# Altium PCB OGS_Headstage.PcbDoc
Units mil, origin at the board's own origin, x right, y up, seen from the top; angles counter-clockwise.
Board outline 6000 x 4000 mil, 2 copper layers (Top Layer, Bottom Layer); 33 components, 31 nets, 128 pads, 14 vias.
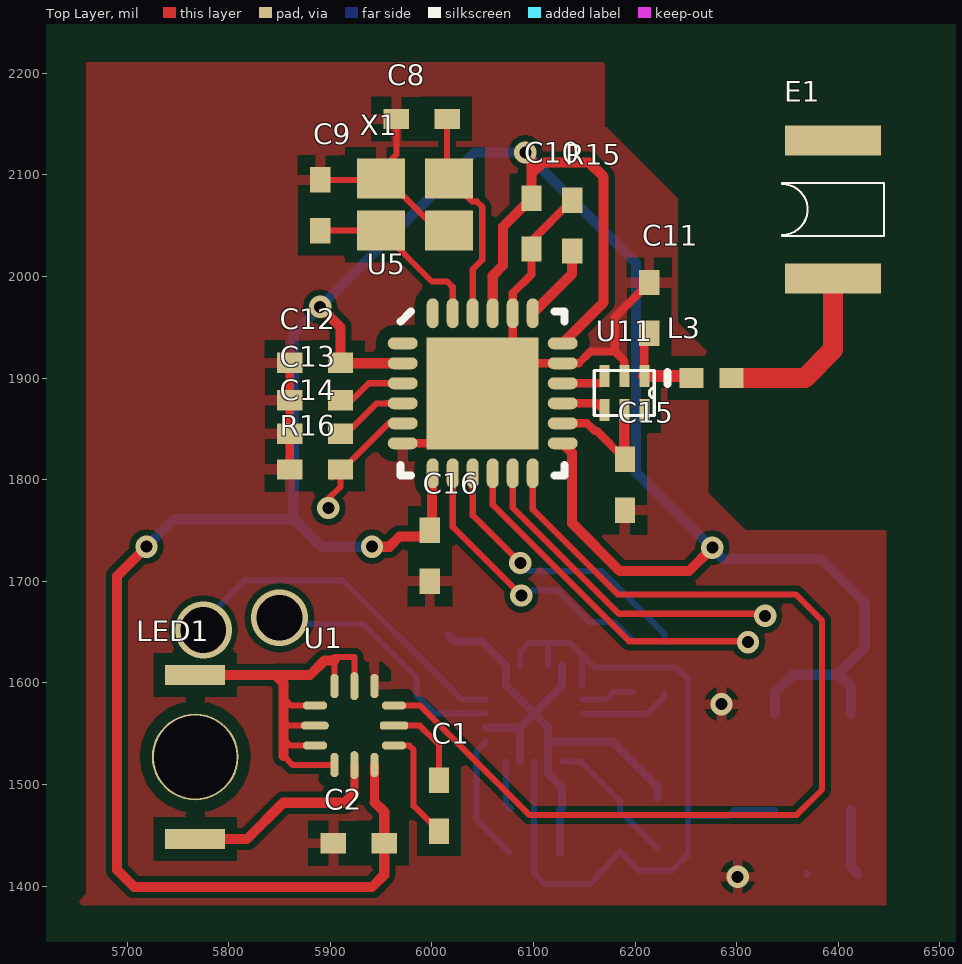
[diagram p0: Top Layer view]
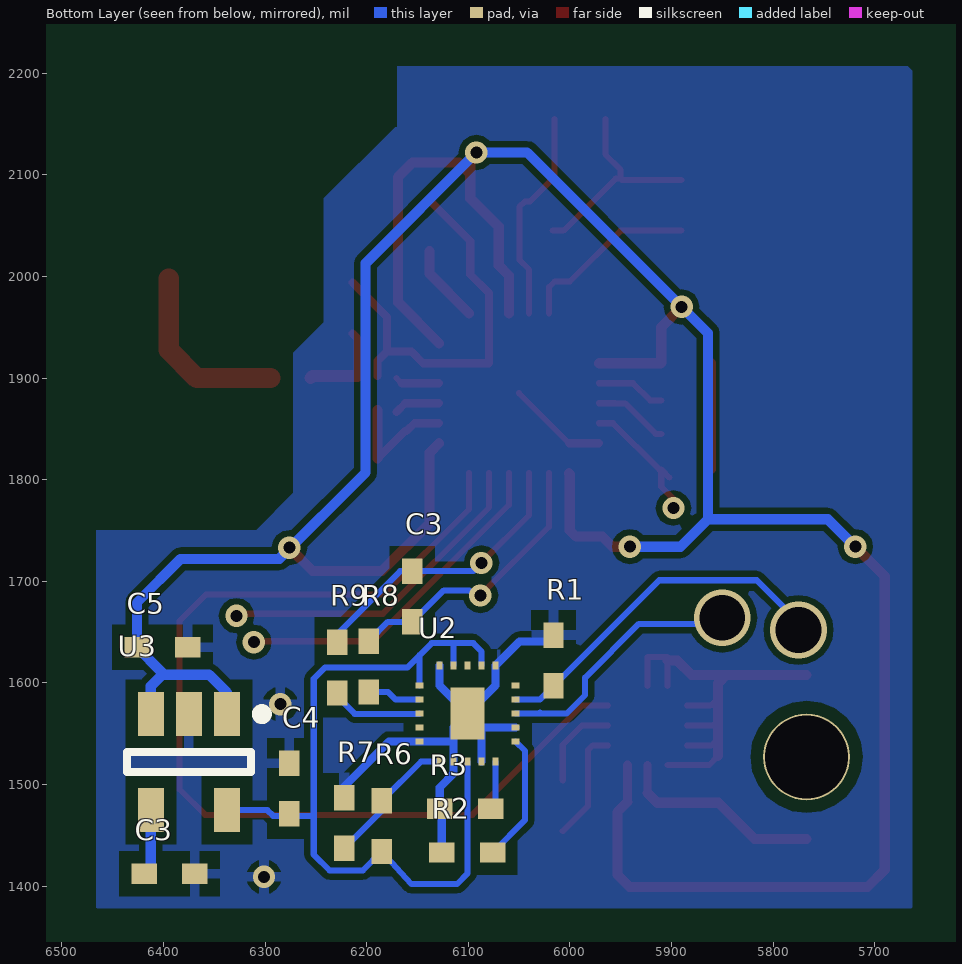
[diagram p1: Bottom Layer view, seen from below]

## Layer stack, top to bottom
Top Layer: signal copper 1.4
Dielectric: dielectric 12.6, FR-4, Dk 4.8
Bottom Layer: signal copper 1.4

## Board outline
1000,1000 7000,1000 7000,5000 1000,5000

## Design rules (kind name [scope] priority, off if disabled: settings)
Clearance Plane_pad_clear [IsPad vs InPolygon] p1: gap=12
Clearance "plane clear" [InPolygon vs InNetClass('All Nets')] p2: gap=6
Clearance clearance1 [All] p3: gap=6
ComponentClearance [All] p1: gap=6 collisioncheckmode=3 verticalgap=0 showdistances=TRUE
Height [All] p1 off: minheight=0 maxheight=1000 prefheight=500
HoleSize [All] p1: absolutevalues=TRUE maxlimit=100 minlimit=10 maxpercent=80.000 minpercent=20.000
HoleToHoleClearance [All] p1: gap=6 allowstackedmicrovias=TRUE
MinimumSolderMaskSliver [All] p1: minsoldermaskwidth=6
PlaneClearance [All] p1: clearance=15
PolygonConnect [All] p1: connectstyle=Relief reliefconductorwidth=10 reliefentries=4 polygonreliefangle="90 Angle"
RoomDefinition SingleASIC [InComponentClass('SingleASIC')] p1 off: confinementstyle=ConfineIn formatcopy=TRUE lockcomponents=FALSE outline 7045,1245 8520,1245 8520,1460 7045,1460
RoomDefinition Main_4x4 [InComponentClass('Main_4x4')] p2 off: confinementstyle=ConfineIn formatcopy=TRUE lockcomponents=FALSE outline 0,0 2000,0 2000,1000 0,1000
RoomDefinition LED_SOP [InComponentClass('LED_SOP')] p3 off: confinementstyle=ConfineIn formatcopy=TRUE lockcomponents=FALSE outline 7045,1060 7330,1060 7330,1195 7045,1195
RoutingCorners [All] p1: cornerstyle=45-Degree minsetback=20 maxsetback=20
RoutingVias [All] p1: holewidth=12 width=22 viastyle="Through Hole" minholewidth=12 minwidth=22 maxholewidth=30 maxwidth=50
SilkscreenOverComponentPads [OnLayer('Mechanical 13') vs OnLayer('Mechanical 15')] p1: minsilkscreentomaskgap=10
SolderMaskExpansion [All] p1: expansion=0
Width Width_v3p0 [InNet('V3P0')] p1: maxlimit=50 minlimit=6 preferedwidth=10
Width [All] p2: maxlimit=30 minlimit=6 preferedwidth=6
20 further rules are at their usual default settings.

## Classes and differential pairs
component class SingleASIC: C3 C4 C5 R1 R2 R3 R6 R7 R8 R9 U2 U3
component class Main_4x4: C8 C9 C10 C11 C12 C13 C14 C15 C16 E1 L3 R15 R16 U5 U11 X1
component class LED_SOP: C1 C2 LED1 U1

## Components (designator, comment, footprint, x,y, rotation, side; value= is the part's Value field where it differs from the comment)
C1 "NP0 50V" 0402S 6007,1479 r90 top
C2 "NP0 50V" 0402S 5928,1442 r0 top
C3 "NP0 50V" 0402s 6394,1412 r0 bottom
C3 "NP0 50V" 0402S 6155,1685 r90 bottom
C4 "NP0 50V" 0402s 6276,1496 r90 bottom
C5 "NP0 50V" 0402s 6401,1635 r0 bottom
C8 "NP0 50V" 0402S 5990,2155 r0 top
C9 "NP0 50V" 0402S 5890,2070 r90 top
C10 "NP0 50V" 0402S 6098,2052 r270 top
C11 "NP0 50V" 0402S 6214,1969 r270 top
C12 "NP0 50V" 0402S 5885,1915 r180 top
C13 "NP0 50V" 0402S 5885,1878 r0 top
C14 "NP0 50V" 0402S 5885,1845 r180 top
C15 "NP0 50V" 0402S 6190,1795 r270 top
C16 "NP0 50V" 0402S 5998,1725 r90 top
E1 "MicroAntenna" MICROANTENNA 6394.73,1998 r90 top
L3 "Inductor" 0402-A 6275,1900 r0 top
LED1 "osram_hiled" "OSRAM LED" 5767,1527 r270 top
R1 "Res2" 0402S 6016,1622 r270 bottom
R2 "Res2" 0402S 6101,1433 r0 bottom
R3 "Res2" 0402S 6103,1476 r0 bottom
R6 "Res2" 0402S 6185,1459 r270 bottom
R7 "Res2" 0402S 6222,1462 r270 bottom
R8 "Res2" 0402S 6198,1616 r270 bottom
R9 "Res2" 0402S 6229,1615 r270 bottom
R15 "Res2" 0402S 6138,2050 r90 top
R16 "Res2" 0402S 5885,1810 r0 top
U1 "ZLED7022" 12UTQFN 5904,1519 r90 top
U2 "Single_ASIC" Single_ASIC 6073,1617 r270 bottom
U3 "tps79915" SOT23-5AN 6375,1522 r270 bottom
U5 "QFN24 4x4 package" NORDIC_QFN50P400X400X90-25N 6050,1885 r0 top
U11 "balun" BALUN 6209,1902 r270 top
X1 "TSX-3225, 16MHz, Cl=9pF, +/-10ppm" "BT-XTAL 2.5 X 2 MM" 5950,2045 r0 top

## Footprints (in the part's own frame and the unit in brackets; to place one, negate y for a bottom-side part, rotate by r counter-clockwise, add the part's x,y. Pads: shape width x height; smd on the part's side, far side on the other; paste and mask are expansions set on the pad)
12UTQFN [mm]
  oct 0.6x0.2 smd: 1(0,0) 3(0,-1) 7(1.975,-1) 9(1.975,0)
  oval 0.7x0.2 smd: 2(0,-0.5) 8(1.975,-0.5)
  oct 0.2x0.6 smd: 4(0.487,-1.487) 6(1.487,-1.487) 10(1.487,0.487) 12(0.487,0.487)
  rrect50% 0.2x0.7 smd: 5(0.987,-1.487)
  oval 0.2x0.7 smd: 11(0.987,0.487)
0402-A [mm] "Chip Inductor, Body 1.0x0.5mm, IPC High Density"
  rect 0.6x0.5 smd: 1(-0.5,0) 2(0.5,0)
  silkscreen extent -1.1,-0.15 -1.1,0.15, body extent -0.55,-0.3 0.55,0.3, height 0.55
0402S [mil]
  rect 25x20 smd: 1(-25,0) 2(25,0)
0402s [mil]
  rect 25x20 smd: 1(-25,0) 2(25,0)
BALUN [mm]
  rect 0.55x0.25 smd: 1(0,0) 2(0,-0.5) 3(0,-1) 4(0.85,-1) 5(0.85,-0.5) 6(0.85,0)
  silkscreen extent -0.14,-1.25 0.99,0.25
"BT-XTAL 2.5 X 2 MM" [mm] "Mercury X32 series"
  rect 1.2x1 smd: 1(0,0) 2(1.7,0) 3(1.7,1.3) 4(0,1.3)
MICROANTENNA [mm]
  rect 0.75x2.4 smd: 1(0,0) 2(3.45,0)
  silkscreen extent 1.06,-1.27 2.39,1.27
NORDIC_QFN50P400X400X90-25N [mm] "QFN24 4x4x0.85mm, 0.5mm pitch - Medium Density"
  oval 0.75x0.3 smd: 1(-2,1.25) 2(-2,0.75) 3(-2,0.25) 4(-2,-0.25) 5(-2,-0.75) 6(-2,-1.25) 13(2,-1.25) 14(2,-0.75) 15(2,-0.25) 16(2,0.25) 17(2,0.75) 18(2,1.25)
  oval 0.3x0.75 smd: 7(-1.25,-2) 8(-0.75,-2) 9(-0.25,-2) 10(0.25,-2) 11(0.75,-2) 12(1.25,-2) 19(1.25,2) 20(0.75,2) 21(0.25,2) 22(-0.25,2) 23(-0.75,2) 24(-1.25,2)
  rect 2.8x2.8 smd: 25(0,0)
  silkscreen extent -2.05,-2.05 2.05,2.05
"OSRAM LED" [mm]
  round 2.167 hole 2.067: 0(0,0)
  rect 0.5x1.5 smd: 1(-2.05,0) 2(2.05,0)
Single_ASIC [mm]
  rect 0.15x0.2 smd: 1(0.5,0.5) 2(0.85,0.5) 3(1.2,0.5) 4(1.55,0.5) 5(1.9,0.5) 11(1.9,-1.9) 12(1.55,-1.9) 13(1.2,-1.9) 14(0.85,-1.9) 15(0.5,-1.9)
  rect 0.2x0.15 smd: 6(2.4,0) 7(2.4,-0.35) 8(2.4,-0.7) 9(2.4,-1.05) 10(2.4,-1.4) 16(0,-1.4) 17(0,-1.05) 18(0,-0.7) 19(0,-0.35) 20(0,0)
  rect 1.3x0.85 smd: 21(1.2,-0.7)
SOT23-5AN [mm] "SOT23, 5-Leads, Body 2.9x1.6mm, Pitch 0.95mm, Lead Span 2.8mm, IPC Medium Density"
  rect 1.1x0.65 smd: 1(-1.2,0.95) 2(-1.2,0) 3(-1.2,-0.95) 4(1.2,-0.95) 5(1.2,0.95)
  silkscreen extent -1.32,-1.55 0.25,1.95, body extent -0.9,-1.55 0.9,1.55, height 1.45

## Part data
C1 C2 C3 C3 C4 C5 C8 C9 C10 C11 C12 C13 C14 C15 C16: library part Cap, "Capacitor"
R1 R2 R3 R6 R7 R8 R9 R15 R16: "Resistor"
U1: "ZLED 7022"
U5: library part "nRF24LE1 - 4x4", "2.4GHz Tranceiver with embedded MCU and 10 bit ADC"
X1: library part BT-XTAL, "Crystal"

## Via types
v1: diameter 22, hole 11.8, Top Layer to Bottom Layer, 12 vias
v2: diameter 56, hole 45, Top Layer to Bottom Layer, 2 vias

## Nets (pads, with @x,y where several pads share a name; then routed paths per layer and width w, separated by ;. In a path a pad name is that pad's centre, name@x,y a point inside that pad or via, vN(x,y) a via of type N, cw(c..) or ccw(c..) an arc to the next point about the centre after c; other vN are vias at no path point)
ADC+: C3.2@6155,1710 R9.1 U5.9 | length 275.3
  Top Layer w6: U5.9 6040.16,1764.84 v1(6087,1718)
  Bottom Layer w6: 6095,1710 6155,1710 6167,1710 6229,1648 R9.1
ADC-: C3.1@6155,1660 R8.1 U5.8 | length 279.3
  Top Layer w6: U5.8 6020.47,1753.53 v1(6088,1686)
  Bottom Layer w6: v1@6091,1683 6099,1691 6124,1691 6155,1660 6179,1660 R8.1
ELEC: U2.3 | length 262.8
  Bottom Layer w6: v2(5850,1664) 5850,1662 5846,1658 5932,1658 5985,1605 5985,1588 6003.24,1569.76 6030.36,1569.76 ; 6029.46,1570.65 6030.36,1569.76 ; U2.3 6030.36,1569.76
ELEC_REF: R1.2 U2.2 | length 354.8
  Bottom Layer w6: v2(5775,1652) 5773,1652 5773,1658 5816,1701 5912,1701 R1.2 6029.46,1583.54 U2.2
GND: C2.1 C3.1@6369,1412 C4.2 C5.1 C8.1 C9.2 C10.2 C11.1 C12.2 C13.1 C14.2 C15.2 C16.1 R1.1 R2.2 R3.2 R7.1 R15.2 R16.1 U1.7 U2.4 U2.7 U2.9 U2.11 U2.16 U2.20 U2.21 U3.2 U5.6 U5.17 U5.20 U5.25 U11.2 X1.2 X1.4 | length 1376.7
  Top Layer w6: C9.2 5948.82,2095 X1.4 ; C8.1 5965,2120 5950,2105 X1.4 ; U5.25@6000.79,1835.79 U5.25 ; X1.2 6006.03,2045 5954.85,2096.18 X1.4
  Top Layer w8: R16.1 C14.2 C13.1 C12.2 ; U5.6 U5.25@6000.79,1835.79 ; R15.2 6098,2035 C10.2 6098,2002 6079.53,1983.53 U5.20 6079.53,1914.53 U5.17 6144.53,1914.53 6156,1926 6180,1926 ; U11.2 6189.31,1916.68 6180,1926 ; C11.1 6180,1960 6180,1926
  Bottom Layer w8: R1.1 6022.5,1640.5 6049.5,1640.5 U2.20 6073,1597.32 U2.21 ; U2.4 U2.21@6086.78,1555.98 ; U2.7 U2.21@6086.78,1555.98 ; R2.2 6126,1474 R3.2 6128,1497 6114.34,1510.66 U2.9 6114.34,1542.2 ; U2.16 6128.12,1597.32 U2.21 ; R7.1 6222,1498 6177.8,1542.2 U2.11 6114.34,1542.2 ; U2.21@6086.78,1555.98 U2.21 ; U2.21 6114.34,1555.98 6114.34,1542.2
  other v1: 6301,1409 6285,1579
LED_CTRL: U1.6 U5.12 | length 1008.1
  Top Layer w6: U1.6 5988.44,1577.56 6096,1470 6359,1470 6384,1495 6384,1661 6358,1687 6183,1687 6099.21,1770.79 U5.12
NetC1_1: C1.1 U1.4 | length 111.5
  Top Layer w6: U1.4 5977.81,1538.19 5982,1534 5982,1479 C1.1
NetC1_2: C1.2 U1.5 | length 87.3
  Top Layer w6: U1.5 5988.12,1557.88 6007,1539 C1.2
NetC3_2: C3.2@6419,1412 U3.4 | length 65.5
  Bottom Layer w10: U3.4 6412.4,1418.6 C3.2@6419,1412
NetC8_2: C8.2 U5.22 X1.3 | length 212.3
  Top Layer w6: C8.2 6015,2098.11 X1.3 6039.43,2073.68 6044.28,2073.68 6049.55,2068.41 6049.55,2016.32 6040.16,2006.92 U5.22
NetC9_1: C9.1 U5.23 X1.1 | length 179.2
  Top Layer w6: C9.1 X1.1 6000,1995 6015,1995 6020.47,1989.53 U5.23
NetC11_2: C11.2 L3.1 U11.1 | length 91.2
  Top Layer w8: U11.1 6209,1939 C11.2
  Top Layer w12: U11.1 6253.32,1902 L3.1
NetC13_2: C13.2 U5.3 | length 68.2
  Top Layer w6: C13.2 5921,1878 5937.84,1894.84 U5.3
NetC14_1: C14.1 U5.4 | length 73.8
  Top Layer w6: C14.1 5915.5,1845 5945.5,1875 5955,1875 5955.16,1875.16 U5.4
NetC15_1: C15.1 U5.14 U11.5 | length 122.8
  Top Layer w8: U5.14 6152.8,1855.47 6160.57,1847.71 6162.29,1847.71 C15.1@6189.31,1820.68
  Top Layer w10: C15.1@6189.31,1820.68 U11.5
NetE1_1: E1.1 L3.2 | length 181.8
  Top Layer w20: L3.2 6367,1900 6394.73,1927.72 E1.1
NetLED1_1: LED1.1 U1.1 U1.8 U1.9 U1.10 U1.11 U1.12 | length 456.9
  Top Layer w6: 5854,1528 5863,1519 U1.1 ; 5854,1545 5860.81,1538.19 U1.12 ; 5854,1563 5859.12,1557.88 U1.11 ; 5854,1585 5861.44,1577.56 U1.10 ; U1.9 5904,1621.88 5904,1625.32 5923.69,1625.32 U1.8
  Top Layer w10: LED1.1 5845.83,1607.71 ; 5854,1528 5854,1545 5854,1563 5854,1585 5854,1599.54 5845.83,1607.71 ; 5904,1621.88 5894.17,1621.88 5880,1607.71 5845.83,1607.71
NetLED1_2: LED1.2 U1.2 | length 202.8
  Top Layer w8: 5923.69,1491.68 U1.2
  Top Layer w10: LED1.2 5818,1446.29 5853.71,1482 5914,1482 5923.69,1491.68
NetR2_1: R2.1 U2.5 | length 126.3
  Bottom Layer w6: U2.5 6044,1532.88 6044,1465 R2.1
NetR3_1: R3.1 U2.6 | length 48.6
  Bottom Layer w6: U2.6 6073,1481 R3.1
NetR6_1: R6.1 R7.2 U2.10 | length 135.2
  Bottom Layer w6: U2.10 6146.49,1522.51 R6.1 6185,1474 R7.2
NetR8_2: R8.2 U2.14 | length 53.3
  Bottom Layer w6: U2.14 6171.54,1583.54 6179,1591 R8.2
NetR9_2: R9.2 U2.13 | length 91.7
  Bottom Layer w6: U2.13 6148.06,1569.5 6211.73,1569.5 6229,1586.77 R9.2
NetR15_1: R15.1 U5.19 | length 77.3
  Top Layer w10: U5.19 6138,2002.53 R15.1
NetR16_2: R16.2 U5.5 | length 136.9
  Top Layer w6: v1@5892,1772 5898,1778 5898,1781 5910,1793 R16.2 ; R16.2@5902,1802 R16.2 ; U5.5 5957.55,1855.47 5912.08,1810 R16.2
  other v1: 5898,1772
NetU5_15: U5.15 U11.4 | length 45.5
  Top Layer w8: U5.15 6162.01,1875.16 U11.4@6170.63,1866.54
NetU5_16: U5.16 U11.3 | length 44
  Top Layer w6: U11.3@6165.47,1894.84 U11.3@6170.63,1900
  Top Layer w8: U5.16 U11.3@6165.47,1894.84
PROGPIN1: U5.10 | length 338.3
  Top Layer w6: U5.10 6059.84,1775.16 6194.06,1640.94 6288,1640.94 6310.11,1640.94 v1(6311.05,1640)
PROGPIN2: U5.11 | length 325.5
  Top Layer w6: U5.11 6079.53,1772.47 6184,1668 v1@6328,1668
  other v1: 6328,1666
V1P5: C4.1 R6.2 U2.8 U2.15 U2.17 U2.19 U3.5 | length 804.5
  Bottom Layer w6: U2.19 6086.78,1630.78 6095,1639 6115.5,1639 ; U2.8 6100.56,1412.44 6111,1402 6156,1402 R6.2 6203.71,1415.29 6236.29,1415.29 6252,1431 6252,1469 ; U2.17 6114.34,1637.84 6115.5,1639 ; U2.15 6147.8,1627.2 ; U3.5 6297.76,1474.76 6292,1469 6252,1469 ; 6115.5,1639 6136,1639 6147.8,1627.2 ; 6147.8,1627.2 6160,1615 6241,1615 6252,1604 6252,1469
V3P0: C2.2 C5.2 C10.1 C12.1 C16.2 U1.3 U3.1 U3.3 U5.2 U5.7 U5.13 U5.18 U5.21 | length 3236.6
  Top Layer w9: 5943.37,1482.63 U1.3
  Top Layer w10: v1(5719,1734) 5690,1705 5690,1416 5707,1399 5941,1399 5953,1411 C2.2 5953,1473 5943.37,1482.63 ; v1(5890,1970) 5910,1950 C12.1 5910.47,1914.53 U5.2 ; v1(5941,1734) 5958,1734 5968,1744 5994,1744 6000,1750 6000,1805.47 U5.7 ; U5.21 6059.84,2000.7 6070,2010.86 6070,2049 C10.1 6098,2101 ; v1(6092,2122) 6098,2116 6098,2101 ; U5.13 6138,1826.53 6138,1757 6185,1710 6253,1710 v1(6276,1733) ; U5.18 6169,1974.47 6169,2098 6155,2112 6109,2112 6098,2101
  Bottom Layer w10: v1(5719,1734) 5746,1761 5864,1761 ; v1(5941,1734) 5891,1734 5864,1761 ; U3.1 6337.6,1590.6 6355,1608 6401,1608 ; U3.3 6412.4,1596.6 6401,1608 ; 5864,1761 5864,1944 v1(5890,1970) 6042,2122 v1(6092,2122) 6201,2013 6201,1807 6286,1722 6383,1722 6426,1679 C5.2 6402,1611 6402,1608 6401,1608
pads on no net: E1.2 LED1.0 U2.1 U2.12 U2.18 U5.1 U5.24 U11.6

## Polygon pours and split planes (outlines as drawn)
GND on Top Layer "Top Layer-No Net" (solid, pour order 12): 5659.67,2211 5659.67,1392.45 5648,1381 6447.33,1381 6447.33,2199.55 6459,2211 5659.67,2211
GND on Bottom Layer "Top Layer-No Net" (solid, pour order 14): 5663,2212 5663,1379 5664.05,1378 6464.95,1378 6466,1377 6466,2207.01 5667.2,2207.01 5664.05,2210

## Other copper
Top Layer:
  pour cut-out: 6169,2210 6170,2209 6170,2147 6172,2147 6242,2077 6242,1955 6272,1925 6272,1787 6308.67,1750.33 6471,1750.33 6471,2189.79 6452.48,2208.3 6452.48,2211 6444,2211 6443,2212 6442,2211 6170,2211
Bottom Layer:
  pour cut-out: 6169,2210 6170,2209 6170,2147 6172,2147 6242,2077 6242,1955 6272,1925 6272,1787 6308.67,1750.33 6483,1750.33 6483,2215.88 6444,2211 6443,2212 6442,2211 6170,2211